# Altium PCB PCB1.PcbDoc
Units mm, origin at the board's own origin, x right, y up, seen from the top; angles counter-clockwise.
Board outline 103 x 53 mm, 4 copper layers (Top Layer, Internal Plane 1, Internal Plane 2, Bottom Layer); 5 components, 12 nets, 47 pads, 0 vias.
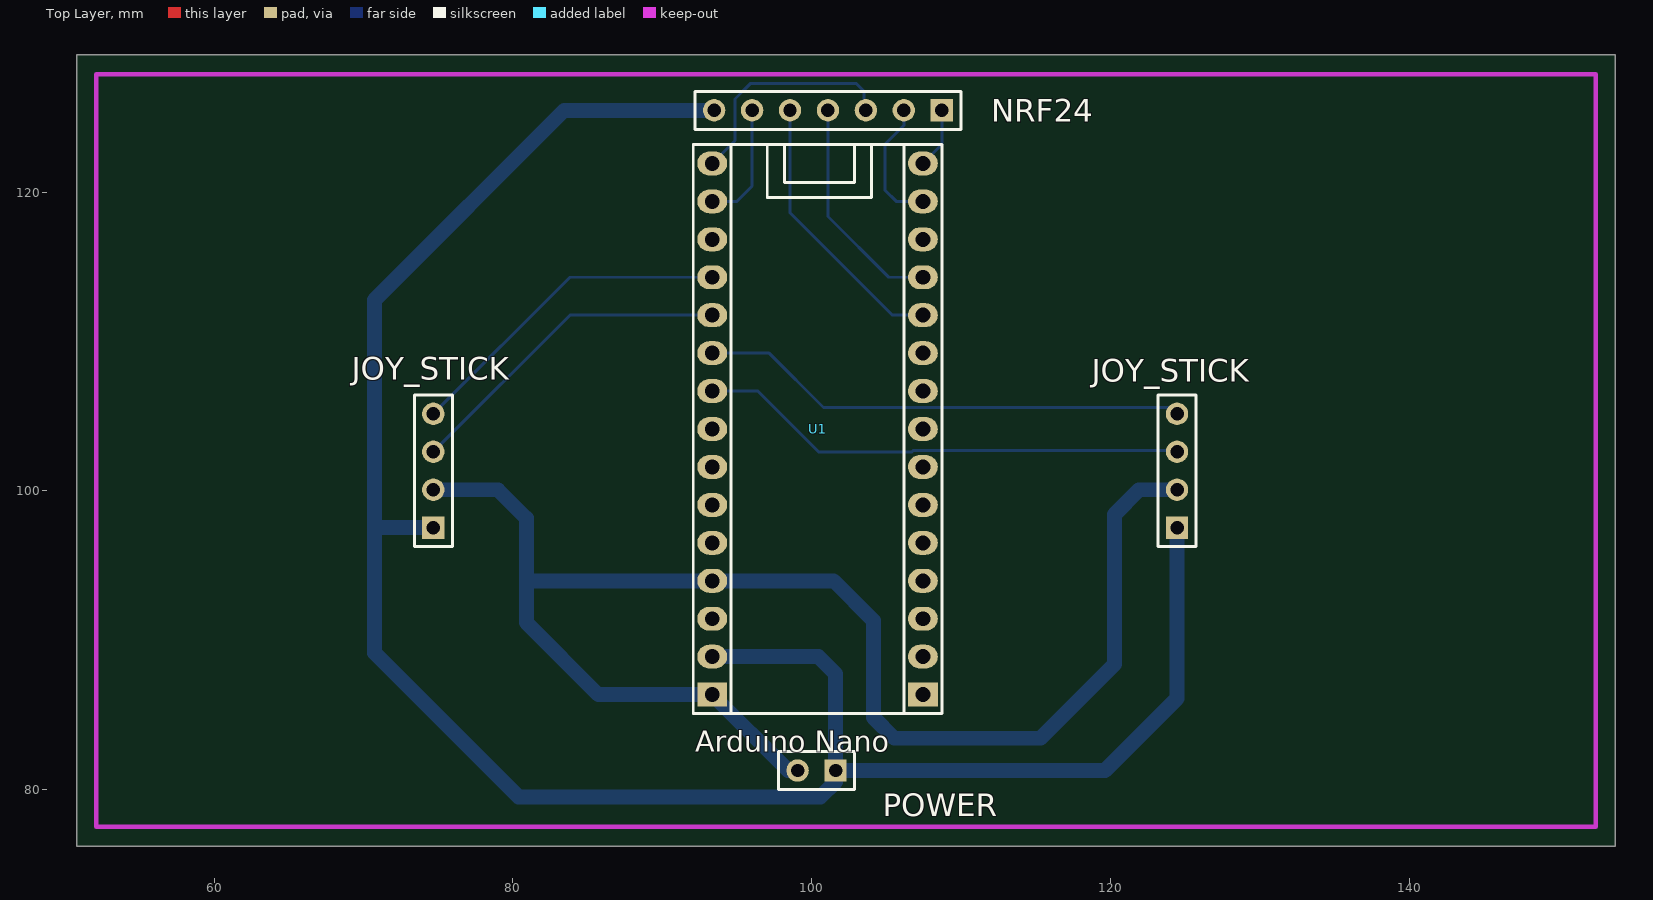
[diagram p0: Top Layer view]
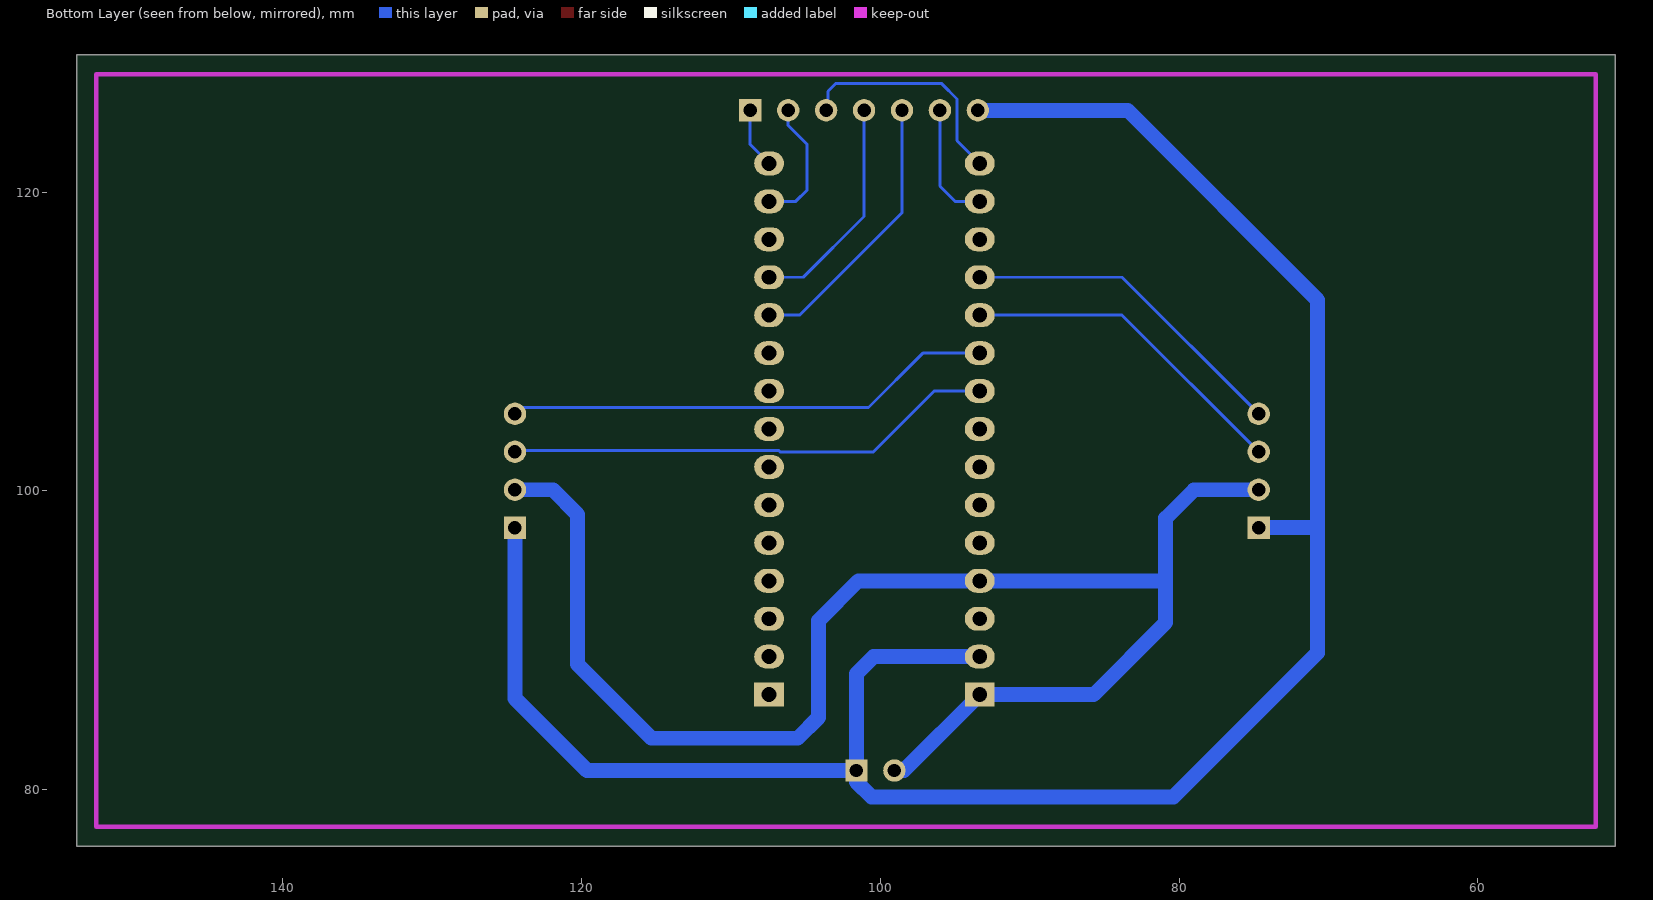
[diagram p1: Bottom Layer view, seen from below]
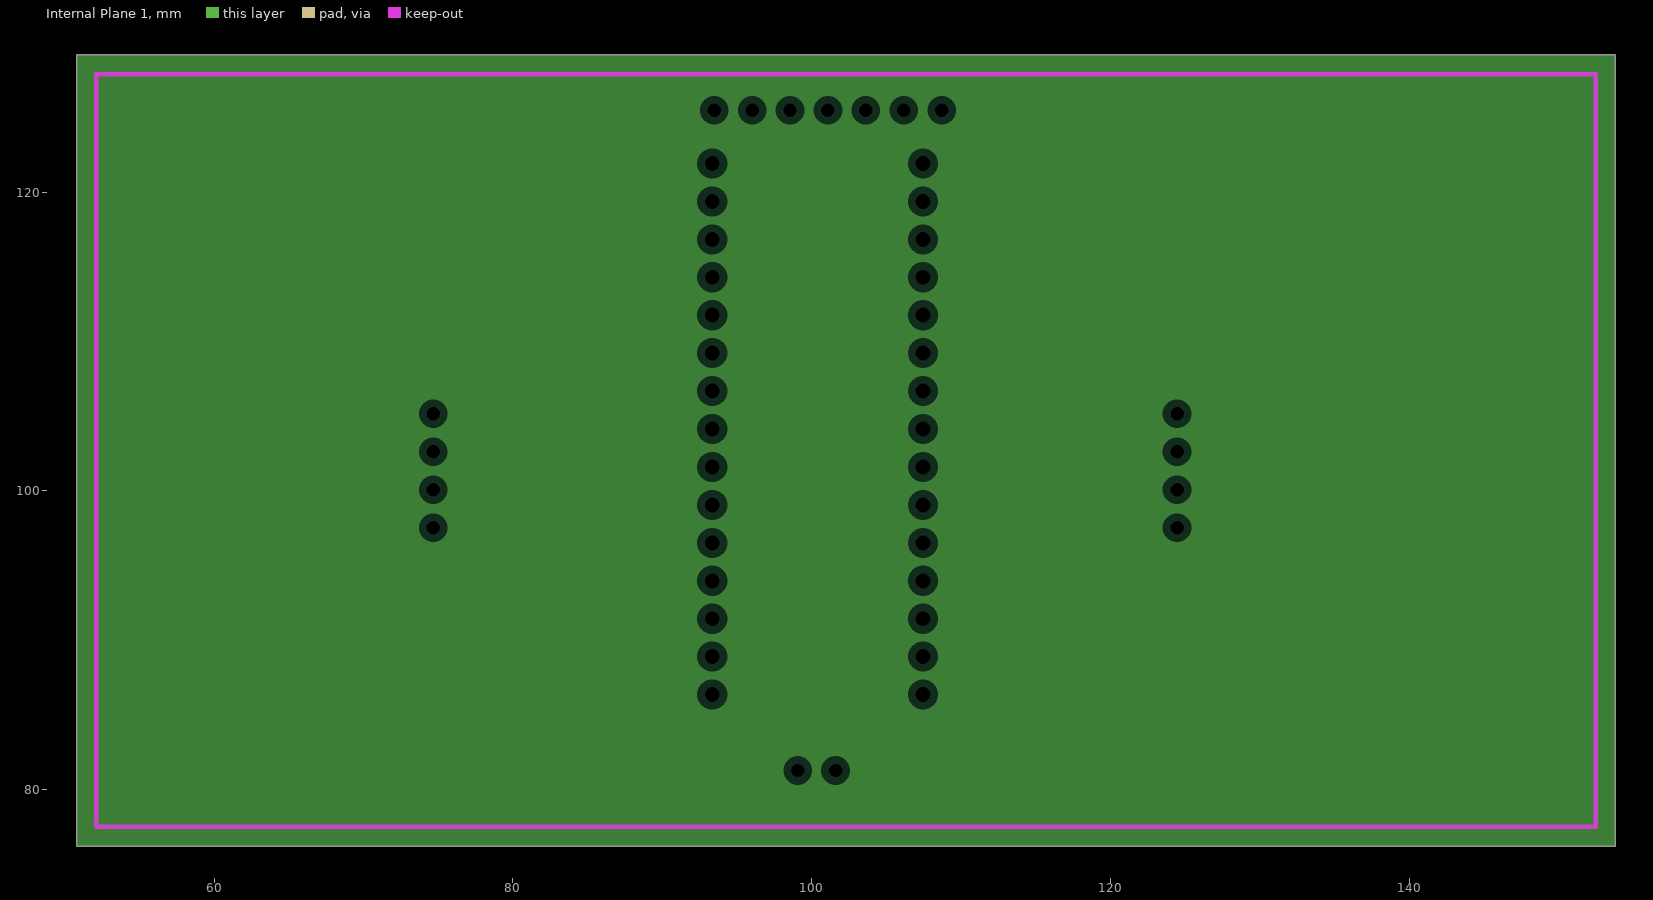
[diagram p2: Internal Plane 1, clearances drawn from the general rule]
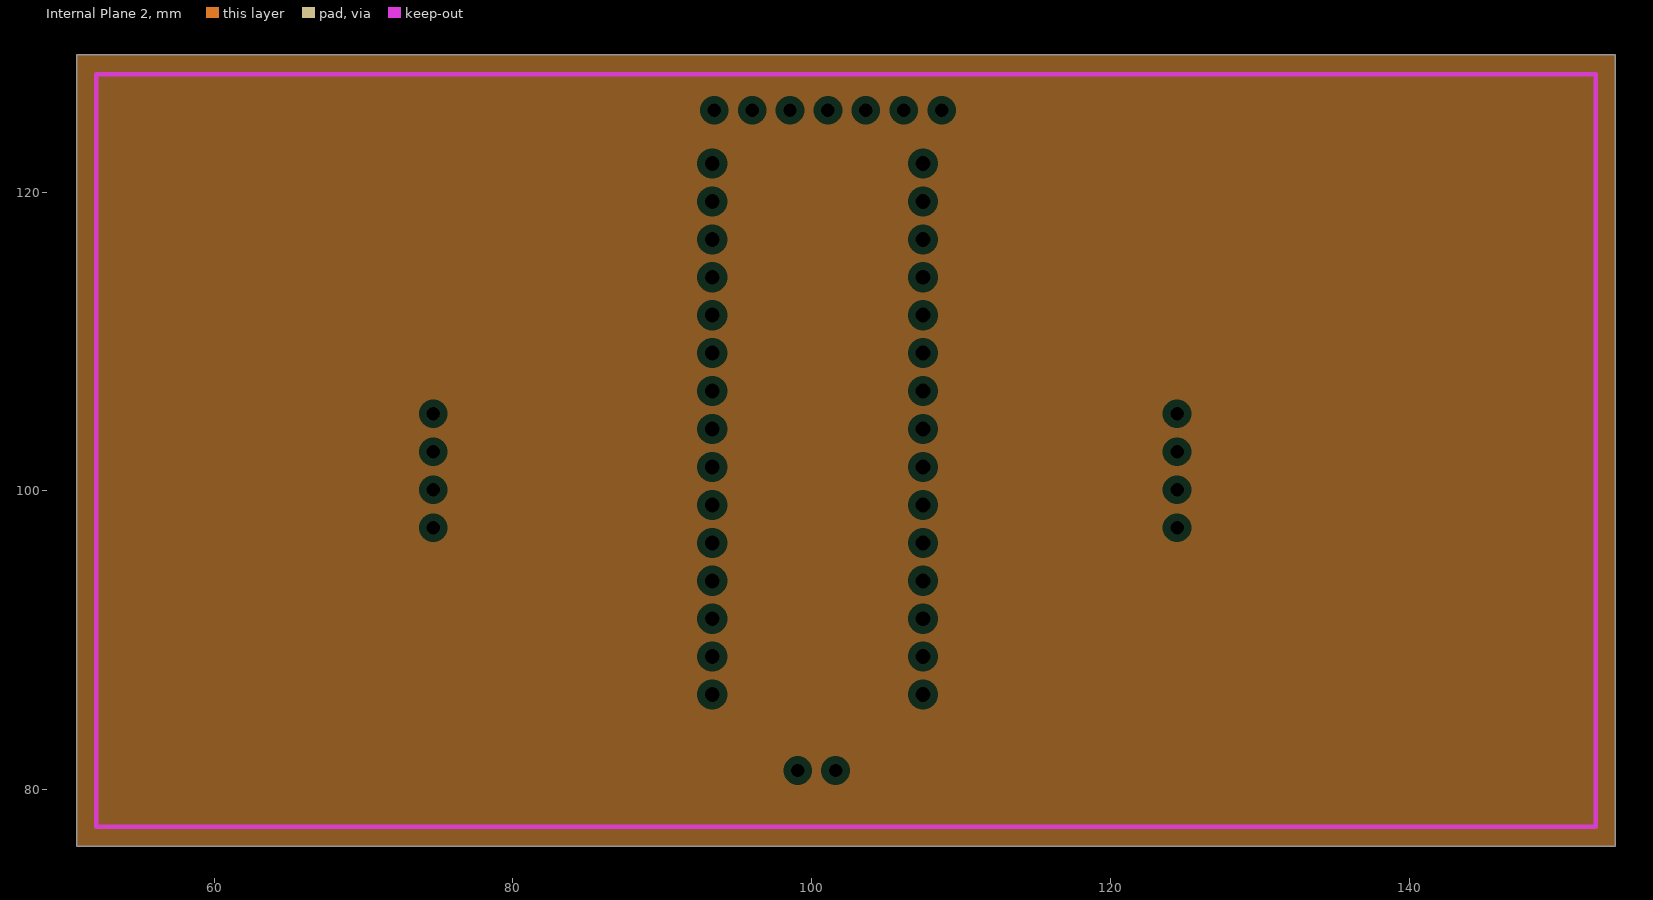
[diagram p3: Internal Plane 2, clearances drawn from the general rule]

## Layer stack, top to bottom
Top Layer: signal copper 0.0356
Dielectric: dielectric 0.32, FR-4, Dk 4.8
Internal Plane 1: plane copper 0.0356
Dielectric: dielectric 0.32, FR-4, Dk 4.8
Internal Plane 2: plane copper 0.0356
Dielectric: dielectric 0.32, FR-4, Dk 4.8
Bottom Layer: signal copper 0.0356

## Board outline
50.8,76.2 153.8,76.2 153.8,129.2 50.8,129.2

## Design rules (kind name [scope] priority, off if disabled: settings)
Clearance [All] p1: gap=0.2
PlaneClearance [All] p1: clearance=0.508
PlaneConnect [All] p1: planeconnectstyle=Relief reliefexpansion=0.508 reliefentries=4 reliefconductorwidth=0.254 reliefairgap=0.254
PolygonConnect [All] p1: connectstyle=Relief reliefconductorwidth=0.254 reliefentries=4 polygonreliefangle="90 Angle"
RoomDefinition Sheet1 [InComponentClass('Sheet1')] p1: confinementstyle=ConfineIn formatcopy=TRUE lockcomponents=FALSE outline 154.94,75.184 158.369,75.184 158.369,88.392 154.94,88.392
RoutingVias [All] p1: holewidth=0.6 width=1 viastyle="Through Hole" minholewidth=0.711 minwidth=1.27 maxholewidth=0.711 maxwidth=1.27
SilkscreenOverComponentPads [All] p1: minsilkscreentomaskgap=0.254
SolderMaskExpansion [All] p1: expansion=0.102
Width GND [InNet('GND')] p1: maxlimit=1 minlimit=1 preferedwidth=1
Width VCC [InNet('+5')] p2: maxlimit=1 minlimit=1 preferedwidth=1
Width NET [All] p3: maxlimit=0.2 minlimit=0.2 preferedwidth=0.2
25 further rules are at their usual default settings.

## Components (designator, comment, footprint, x,y, rotation, side; value= is the part's Value field where it differs from the comment)
JOY_STICK "JoyStick" HDR1X4 74.676,97.536 r90 top (schematic designator P3)
JOY_STICK "JoyStick" HDR1X4 124.46,97.536 r90 top (schematic designator P1)
NRF24 "NRF24" HDR1X7 108.712,125.476 r180 top (schematic designator P2)
POWER "Battery" HDR1X2 101.6,81.28 r180 top (schematic designator P4)
U1 "Arduino Nano" PCBComponent_1 100.584,105.156 r270 top

## Footprints (in the part's own frame and the unit in brackets; to place one, negate y for a bottom-side part, rotate by r counter-clockwise, add the part's x,y. Pads: shape width x height; smd on the part's side, far side on the other; paste and mask are expansions set on the pad)
HDR1X2 [mm] "Connector; Header; 2 Position"
  rect 1.5x1.5 hole 0.9: 1(0,0)
  round 1.5 hole 0.9: 2(2.54,0)
  silkscreen extent -1.27,-1.27 3.81,1.27
HDR1X4 [mm] "Connector; Header; 4 Position"
  rect 1.5x1.5 hole 0.9: 1(0,0)
  round 1.5 hole 0.9: 2(2.54,0) 3(5.08,0) 4(7.62,0)
  silkscreen extent -1.27,-1.27 8.89,1.27
HDR1X7 [mm] "Connector; Header; 7 Position"
  rect 1.5x1.5 hole 0.9: 1(0,0)
  round 1.5 hole 0.9: 2(2.54,0) 3(5.08,0) 4(7.62,0) 5(10.16,0) 6(12.7,0) 7(15.24,0)
  silkscreen extent -1.27,-1.27 16.51,1.27
PCBComponent_1 [mm]
  rect 1.6x2 hole 1: 1(18.796,6.858) 30(18.796,-7.239)
  oval 1.6x2 hole 1: 2(16.256,6.858) 3(13.716,6.858) 4(11.176,6.858) 5(8.636,6.858) 6(6.096,6.858) 7(3.556,6.858) 8(1.016,6.858) 9(-1.524,6.858) 10(-4.064,6.858) 11(-6.604,6.858) 12(-9.144,6.858) 13(-11.684,6.858) 14(-14.224,6.858) 15(-16.764,6.858) 16(-16.764,-7.239) 17(-14.224,-7.239) 18(-11.684,-7.239) 19(-9.144,-7.239) 20(-6.604,-7.239) 21(-4.064,-7.239) 22(-1.524,-7.239) 23(1.016,-7.239) 24(3.556,-7.239) 25(6.096,-7.239) 26(8.636,-7.239) 27(11.176,-7.239) 28(13.716,-7.239) 29(16.256,-7.239)
  silkscreen extent -18.03,-8.51 20.07,8.13

## Part data
JOY_STICK JOY_STICK: library part "Header 4", "Header, 4-Pin"
NRF24: library part "Header 7", "Header, 7-Pin"
POWER: library part "Header 2", "Header, 2-Pin"
U1: library part Component_1

## Nets (pads, with @x,y where several pads share a name; then routed paths per layer and width w, separated by ;. In a path a pad name is that pad's centre, name@x,y a point inside that pad or via, vN(x,y) a via of type N, cw(c..) or ccw(c..) an arc to the next point about the centre after c; other vN are vias at no path point)
3V3: NRF24.6 U1.17 | length 8.2
  Bottom Layer w0.2: U1.17 94.996,119.38 96.012,120.396 NRF24.6
+5: JOY_STICK.2 POWER.2 U1.27 U1.30 | length 100.9
  Bottom Layer w1: JOY_STICK.2@74.676,100.076 78.994,100.076 80.899,98.171 80.899,93.726 ; POWER.2 98.425,81.28 U1.30 85.725,86.36 80.899,91.186 80.899,93.726 ; JOY_STICK.2@124.46,100.076 121.92,100.076 120.269,98.425 120.269,88.392 115.316,83.439 105.537,83.439 104.14,84.836 104.14,91.313 101.473,93.98 U1.27 81.153,93.98 80.899,93.726
CE: NRF24.5 U1.11 | length 18.6
  Bottom Layer w0.2: NRF24.5 98.552,118.618 105.41,111.76 U1.11
CSN: NRF24.4 U1.12 | length 15.1
  Bottom Layer w0.2: NRF24.4 101.092,118.364 105.156,114.3 U1.12
GND: JOY_STICK.1 NRF24.7 POWER.1 U1.29 | length 143.1
  Bottom Layer w1: JOY_STICK.1@74.676,97.536 70.866,97.536 70.739,97.663 ; U1.29 100.457,88.9 101.6,87.757 POWER.1 ; NRF24.7 83.439,125.476 70.739,112.776 70.739,97.663 ; JOY_STICK.1@124.46,97.536 124.46,86.106 119.634,81.28 POWER.1 ; 70.739,97.663 70.739,89.154 80.391,79.502 100.584,79.502 101.6,80.518 POWER.1
MISO: NRF24.1 U1.15 | length 4.1
  Bottom Layer w0.2: U1.15 108.712,123.19 NRF24.1
MOSI: NRF24.2 U1.14 | length 8.7
  Bottom Layer w0.2: NRF24.2 106.172,124.46 104.902,123.19 104.902,120.142 105.664,119.38 U1.14
NetP1_3: JOY_STICK.3@124.46,102.616 U1.22 | length 32.9
  Bottom Layer w0.2: U1.22 96.393,106.68 100.457,102.616 106.702,102.616 106.786,102.7 124.376,102.7 JOY_STICK.3@124.46,102.616
NetP1_4: JOY_STICK.4@124.46,105.156 U1.21 | length 32.8
  Bottom Layer w0.2: U1.21 97.155,109.22 100.795,105.58 124.036,105.58 JOY_STICK.4@124.46,105.156
NetP3_3: JOY_STICK.3@74.676,102.616 U1.20 | length 22.5
  Bottom Layer w0.2: JOY_STICK.3@74.676,102.616 83.82,111.76 U1.20
NetP3_4: JOY_STICK.4@74.676,105.156 U1.19 | length 22.5
  Bottom Layer w0.2: JOY_STICK.4@74.676,105.156 83.82,114.3 U1.19
SCK: NRF24.3 U1.16 | length 15.5
  Bottom Layer w0.2: U1.16 94.869,123.444 94.869,126.238 95.885,127.254 102.997,127.254 103.505,126.746 103.505,125.603 NRF24.3
pads on no net: U1.1 U1.2 U1.3 U1.4 U1.5 U1.6 U1.7 U1.8 U1.9 U1.10 U1.13 U1.18 U1.23 U1.24 U1.25 U1.26 U1.28

## Polygon pours and split planes (outlines as drawn)
no net on Internal Plane 1 (split plane): 153.8,76.2 50.8,76.2 50.8,129.2 153.8,129.2
no net on Internal Plane 2 (split plane): 153.8,76.2 50.8,76.2 50.8,129.2 153.8,129.2

## Keep-outs
Keep-Out Layer:
  lines w0.3: 52.1,77.5 52.1,127.9 152.5,127.9 152.5,77.5 52.1,77.5

## Silkscreen, mask and mechanical layers (free items; w line width, h text height)
Drill Drawing:
  text ".LEGEND" at 158.88,81.28 h1.52
  text "Drill Drawing." at 158.88,78.74 h1.52

## Dimensions
52.1,77.5 to 52.1,127.9 on Mechanical 1
52.1,77.5 to 152.5,77.5 on Mechanical 1